# EAGLE board BMS-HVver2.0 (EAGLE 7.6.0), part 1 of 2
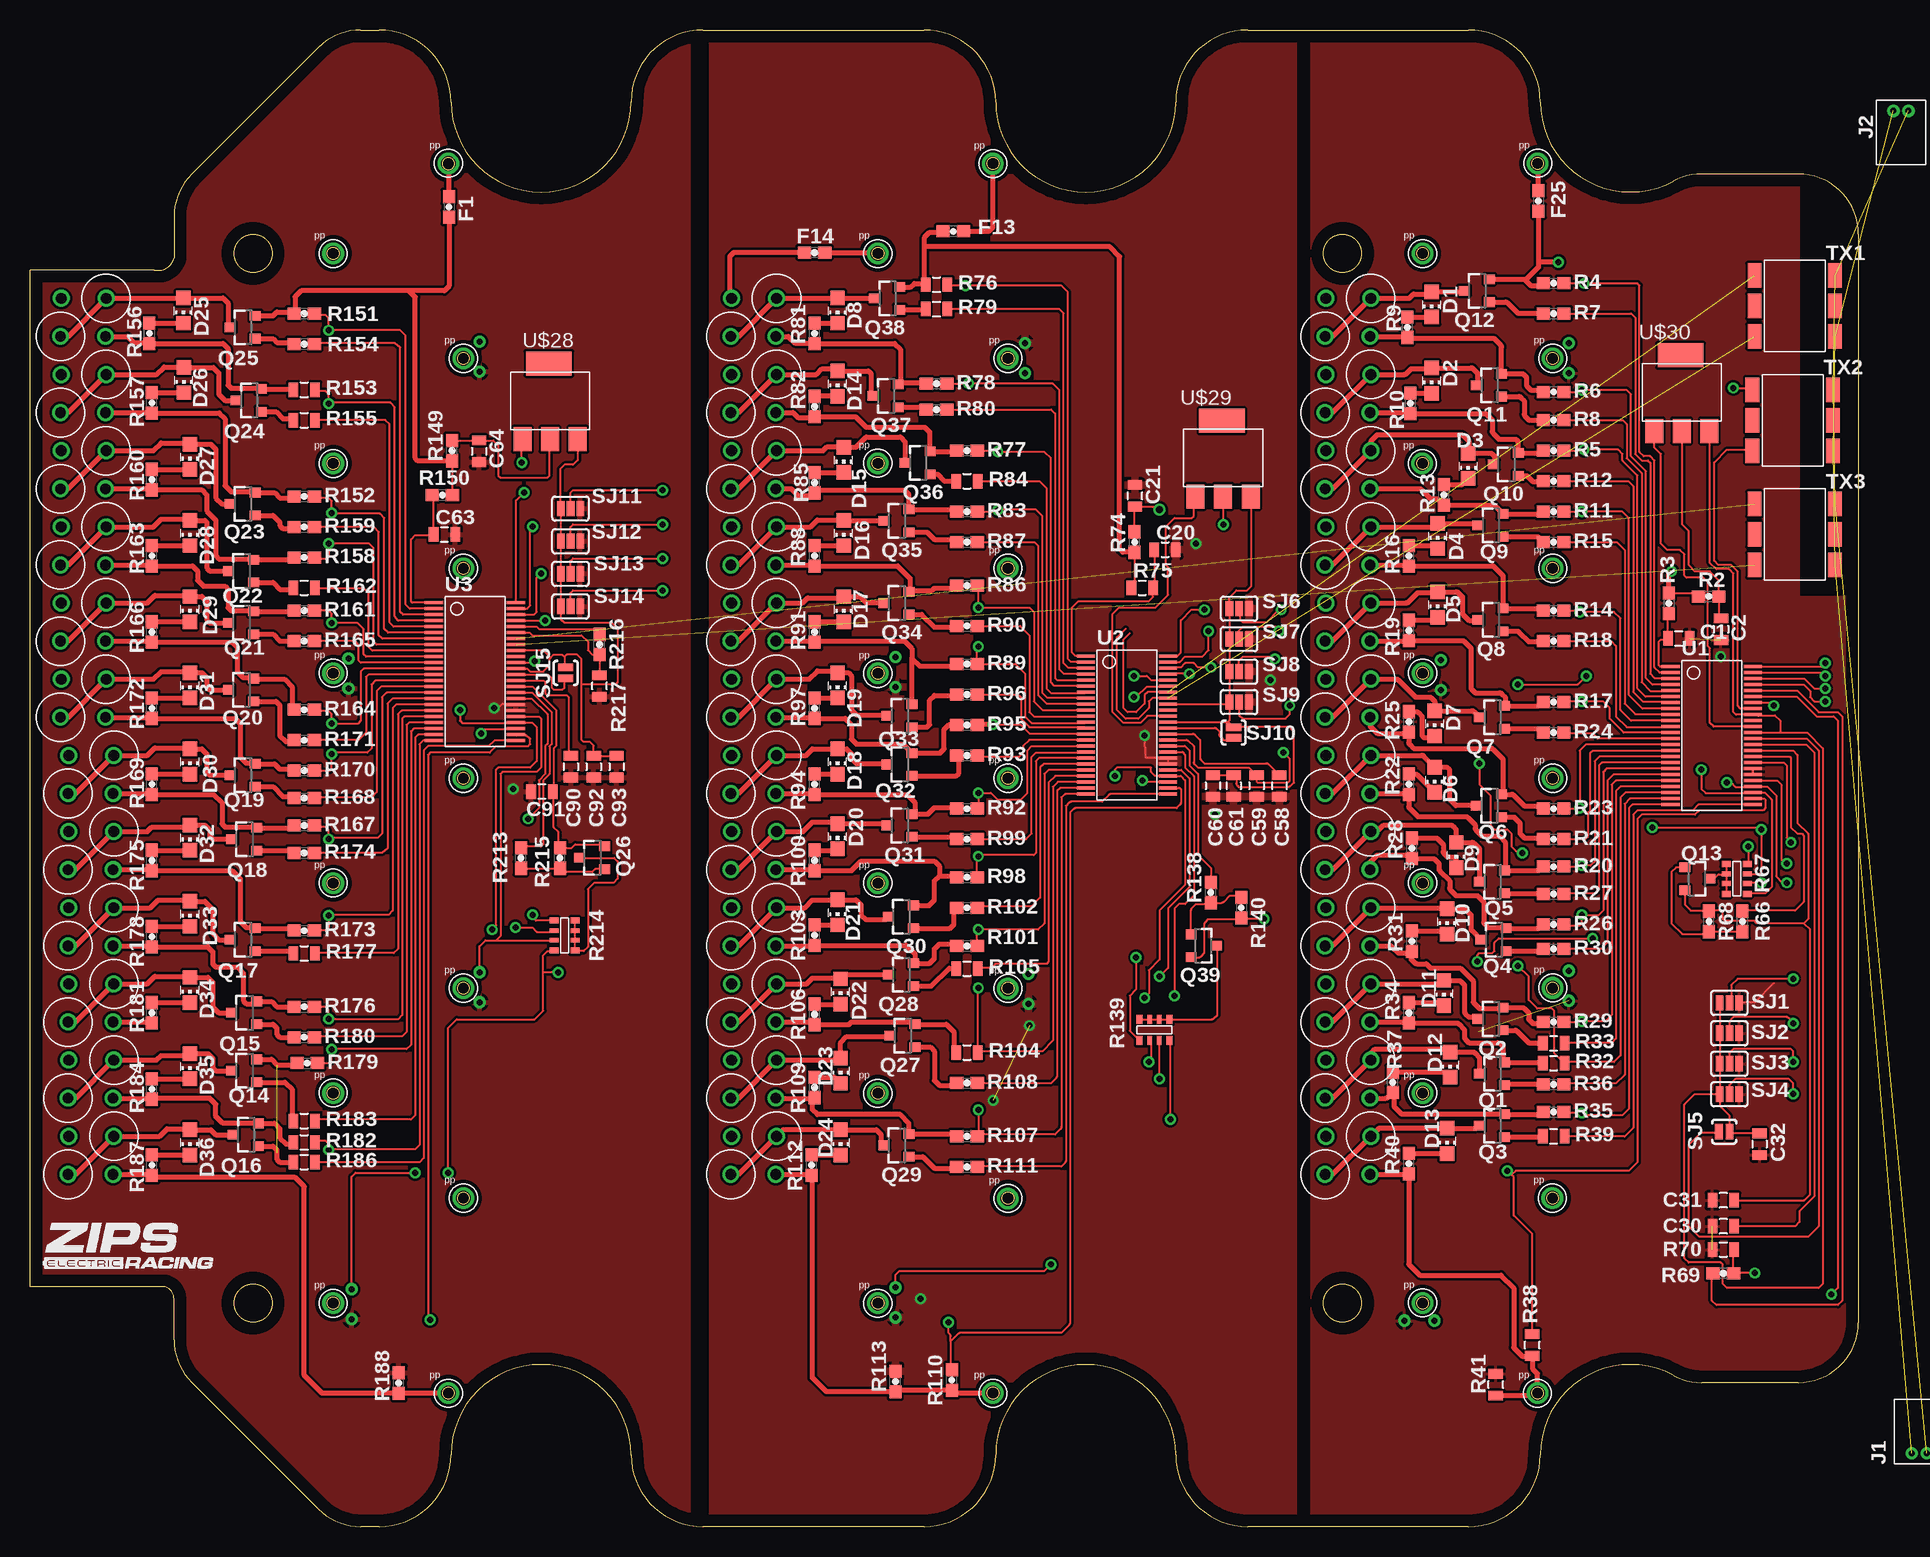
[diagram p0: board, top side]
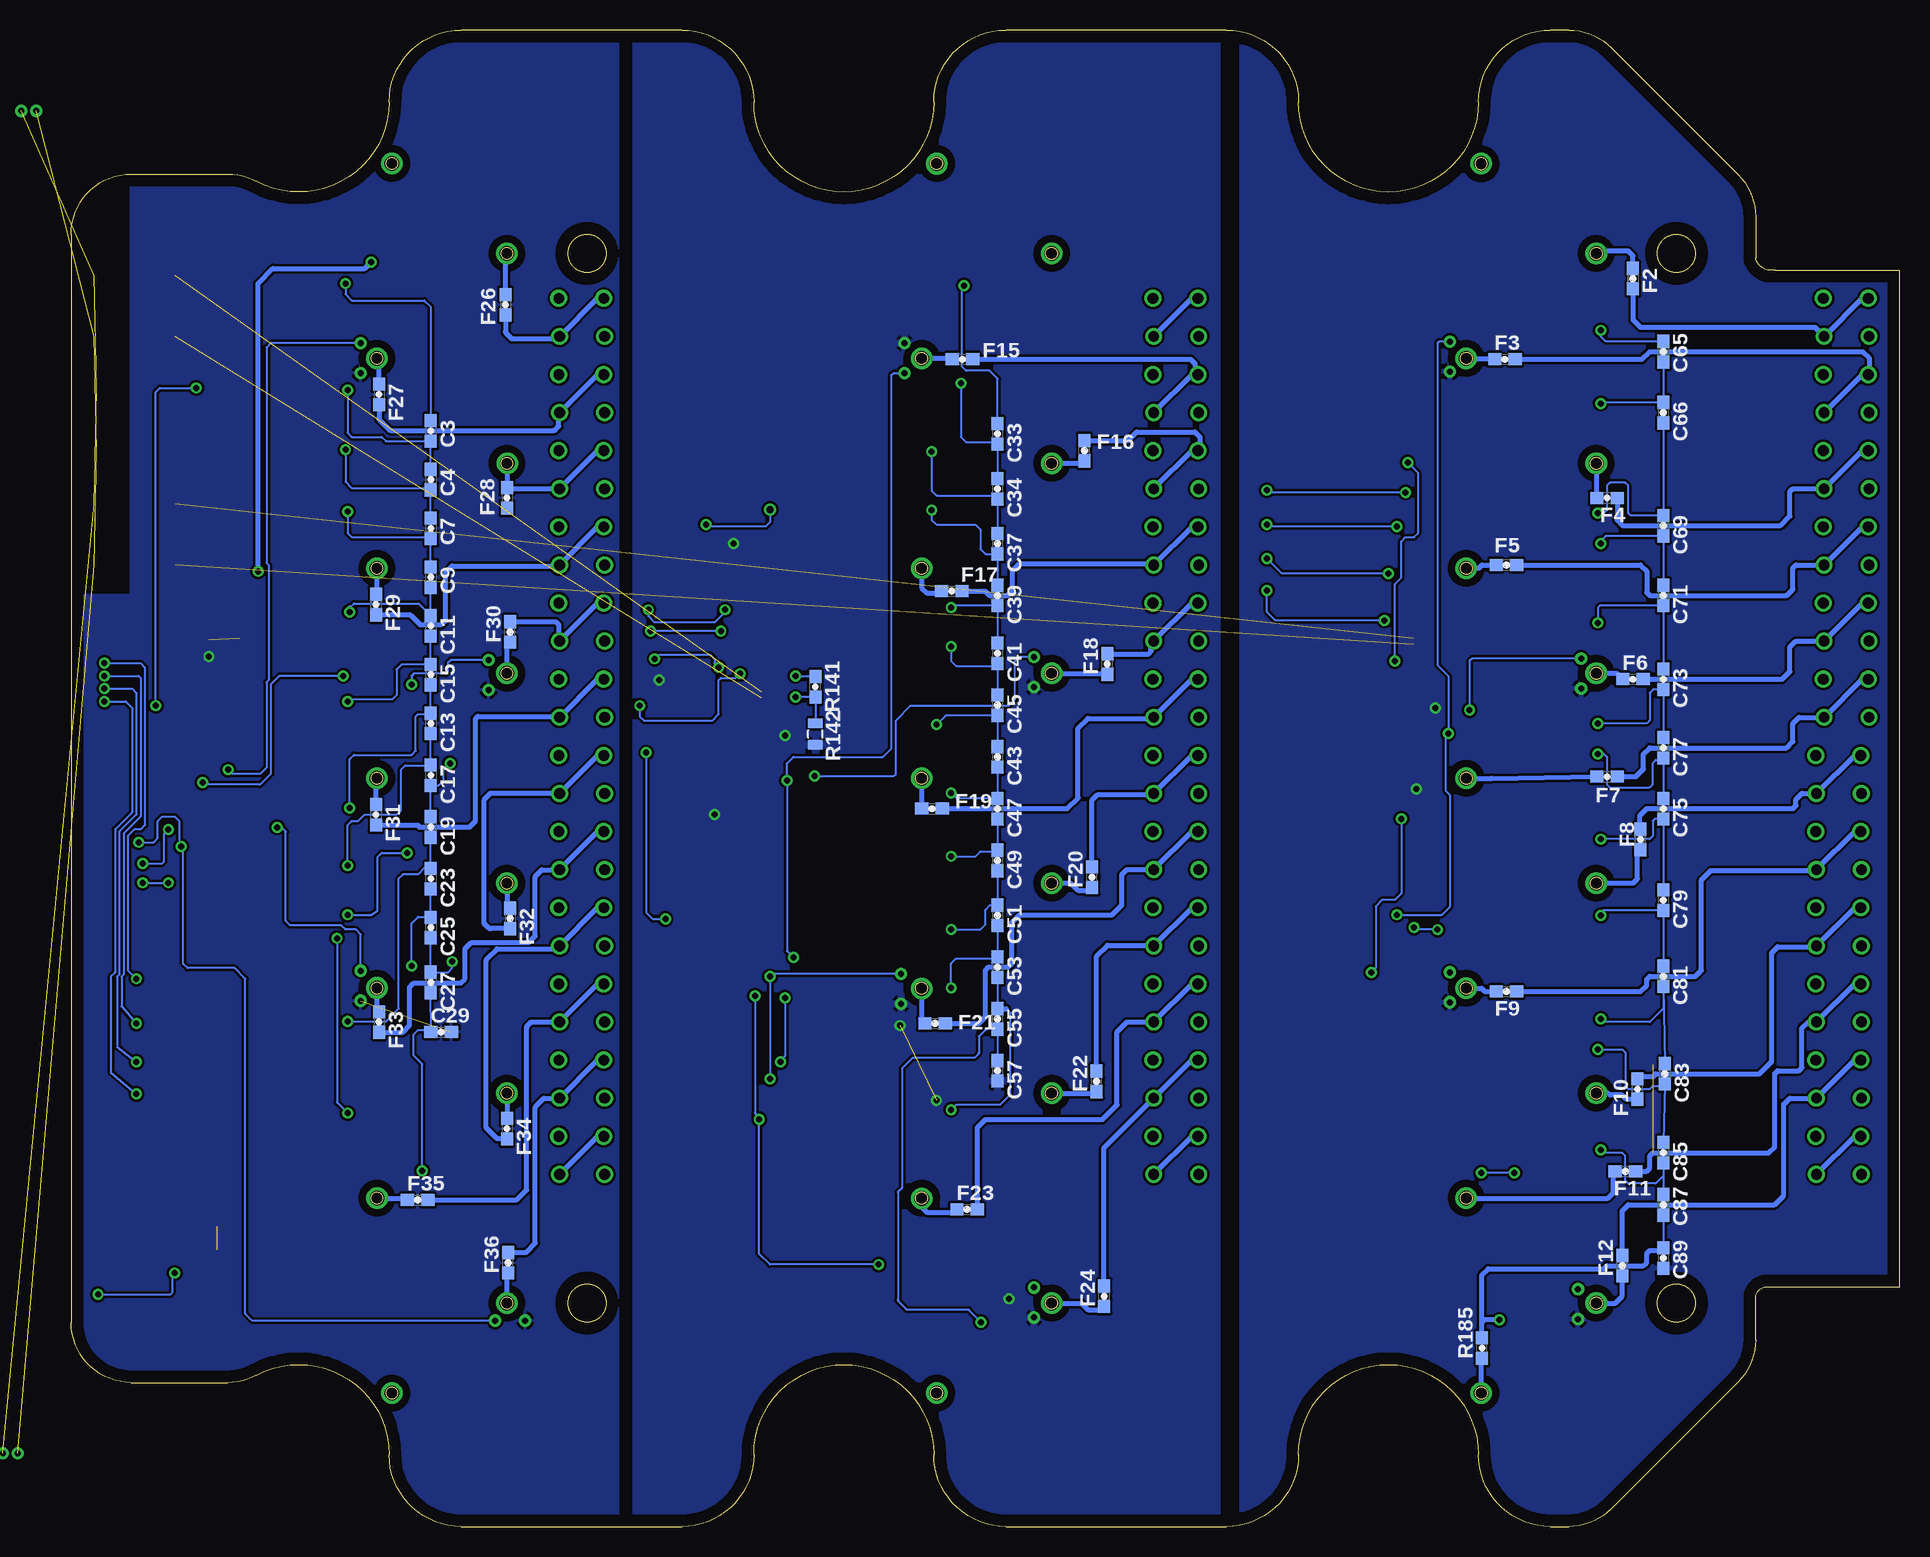
[diagram p1: board, bottom side, seen from below]

Size 152.4 x 124.75 mm. Coordinates in mm from the lower left corner, seen from the top.
Outline: 152.4,107.75 152.4,17 arc-90 147.4,12 139.34,12 arc-28 136.96,12.6 arc118 125.9,6 arc-90 119.9,0 101.5,0 arc-90 95.5,6 arc180 80.5,6 arc-90 74.5,0 56.1,0 arc-90 50.1,6 arc180 35.1,6 arc-90 29.1,0 27.57,0 arc-45 24.04,1.46 13.46,12.03 arc-45 12,15.57 12,19 arc90 11,20 0,20 0,104.75 10.37,104.75 arc90 12,105.75 12,109.18 arc-45 13.46,112.72 24.04,123.29 arc-45 27.57,124.75 29.1,124.75 arc-90 35.1,118.75 arc180 50.1,118.75 arc-90 56.1,124.75 74.5,124.75 arc-90 80.5,118.75 arc180 95.5,118.75 arc-90 101.5,124.75 119.9,124.75 arc-90 125.9,118.75 arc118 136.96,112.15 arc-28 139.34,112.75 147.4,112.75 arc-90 152.4,107.75
Outline: circle at 116.08,53.62 radius 0.5
Outline: circle at 126.92,62.38 radius 0.5
Outline: circle at 25.28,18.62 radius 0.5
Outline: circle at 25.28,36.12 radius 0.5
Outline: circle at 25.28,53.62 radius 0.5
Outline: circle at 70.68,18.62 radius 0.5
Outline: circle at 70.68,36.12 radius 0.5
Outline: circle at 70.68,53.62 radius 0.5
Outline: circle at 116.08,18.62 radius 0.5
Outline: circle at 36.12,27.38 radius 0.5
Outline: circle at 36.12,44.88 radius 0.5
Outline: circle at 36.12,62.38 radius 0.5
Outline: circle at 81.52,27.38 radius 0.5
Outline: circle at 81.52,44.88 radius 0.5
Outline: circle at 81.52,62.38 radius 0.5
Outline: circle at 126.92,27.38 radius 0.5
Outline: circle at 116.08,53.62 radius 0.5
Outline: circle at 126.92,62.38 radius 0.5
Outline: circle at 126.92,44.88 radius 0.5
Outline: circle at 116.08,36.12 radius 0.5
Copper layers (1*16): Top 0.035mm / dielectric 1.5mm / Bottom 0.035mm
Design rules "default": minimum track width 10mil, minimum drill 24mil, track to track 8mil, track to pad 8mil, pad to pad 8mil, via to via 8mil, smd to smd 8mil, copper to edge 40mil, drill to drill 8mil, minimum pad ring 10mil, minimum via ring 8mil, stop-mask expansion 4mil, vias tented up to drill 0mil, thermal gap 10mil

## Footprints (pad centres in the part's own frame; a part is rotated, then mirrored left to right if it is on the bottom)
0805 = smd 0.8 x 1.2: 1 -0.9,0; 2 0.9,0
0603 = smd 1.1 x 1: 1 -0.85,0; 2 0.85,0
CHIP_LED0805 = smd 1.2 x 1.2: A 0,-1.05; C 0,1.05
DF13-2P = drill 0.5: 1 -0.625,0; 2 0.625,0
SOT23 = smd 0.8 x 0.9: 1 -0.95,-1; 2 0.95,-1; 3 0,1.1
RR02J16RTB = drill 0.9: P$1 -3.75,0; P$2 0,0
MNR14 = smd 0.5 x 0.75: 1 -1.25,-0.9; 4 1.25,-0.9; 5 1.25,0.85; 8 -1.25,0.85 | smd 0.4 x 0.75: 2 -0.4,-0.9; 3 0.4,-0.9; 6 0.4,0.85; 7 -0.4,0.85
NTC-NXRT15XH103FA5B = drill 0.5: P$1 0,0; P$2 2.5,0
PAD-JUMPER-3-NO_YES_SILK = smd 0.635 x 1.27: 1 -0.813,0; 2 0,0; 3 0.813,0
PAD-JUMPER-2-NO_YES_SILK = smd 0.635 x 1.27: 1 -0.45,0; 2 0.45,0
PE-68386NLT = smd 1.143 x 2.032: 1 -3.378,2.54; 2 -3.378,0; 3 -3.378,-2.54; 4 3.353,-2.54; 5 3.353,0; 6 3.353,2.54
SSOP-48 = smd 0.25 x 1.524: 1 -5.75,-3.421; 2 -5.25,-3.421; 3 -4.75,-3.421; 4 -4.25,-3.421; 5 -3.75,-3.421; 6 -3.25,-3.421; 7 -2.75,-3.421; 8 -2.25,-3.421; 9 -1.75,-3.421; 10 -1.25,-3.421; 11 -0.75,-3.421; 12 -0.25,-3.421; 13 0.25,-3.421; 14 0.75,-3.421; 15 1.25,-3.421; 16 1.75,-3.421; 17 2.25,-3.421; 18 2.75,-3.421; 19 3.25,-3.421; 20 3.75,-3.421; 21 4.25,-3.421; 22 4.75,-3.421; 23 5.25,-3.421; 24 5.75,-3.421; 25 5.75,3.421; 26 5.25,3.421; 27 4.75,3.421; 28 4.25,3.421; 29 3.75,3.421; 30 3.25,3.421; 31 2.75,3.421; 32 2.25,3.421; 33 1.75,3.421; 34 1.25,3.421; 35 0.75,3.421; 36 0.25,3.421; 37 -0.25,3.421; 38 -0.75,3.421; 39 -1.25,3.421; 40 -1.75,3.421; 41 -2.25,3.421; 42 -2.75,3.421; 43 -3.25,3.421; 44 -3.75,3.421; 45 -4.25,3.421; 46 -4.75,3.421; 47 -5.25,3.421; 48 -5.75,3.421
POGOPIN = drill 1.2: 1 0,0
SOT223 = smd 1.5 x 2: P$1 0,0; P$2 2.3,0; P$3 4.6,0 | smd 3.8 x 2: P$4 2.2,6.3

## Placement (x,y rotation side)
C1  0.1UF  [0805]  137.44,74.03 0 top
C2  0.1UF  [0805]  140.94,74.8 270 top
C3  10NF  [0603]  122.43,91.33 270 bottom
C4  10NF  [0603]  122.43,87.27 270 bottom
C7  10NF  [0603]  122.43,83.2 270 bottom
C9  10NF  [0603]  122.43,79.14 270 bottom
C11  10NF  [0603]  122.43,75.08 270 bottom
C13  10NF  [0603]  122.43,66.95 270 bottom
C15  10NF  [0603]  122.43,71.01 270 bottom
C17  10NF  [0603]  122.43,62.63 270 bottom
C19  10NF  [0603]  122.43,58.31 270 bottom
C20  0.1UF  [0805]  94.62,81.42 0 top
C21  0.1UF  [0805]  92.1,85.92 90 top
C23  10NF  [0603]  122.43,53.99 270 bottom
C25  10NF  [0603]  122.43,49.93 270 bottom
C27  10NF  [0603]  122.43,45.36 270 bottom
C29  10NF  [0603]  121.56,41.22 0 bottom
C30  1UF  [0805]  141.15,25.04 180 top
C31  1UF  [0805]  141.15,27.2 180 top
C32  1UF  [0805]  144.17,31.87 270 top
C33  10NF  [0603]  75.18,91.08 270 bottom
C34  10NF  [0603]  75.18,86.5 270 bottom
C37  10NF  [0603]  75.18,81.93 270 bottom
C39  10NF  [0603]  75.18,77.61 270 bottom
C41  10NF  [0603]  75.18,72.79 270 bottom
C43  10NF  [0603]  75.18,64.15 270 bottom
C45  10NF  [0603]  75.18,68.47 270 bottom
C47  10NF  [0603]  75.18,59.84 270 bottom
C49  10NF  [0603]  75.18,55.52 270 bottom
C51  10NF  [0603]  75.18,50.95 270 bottom
C53  10NF  [0603]  75.18,46.63 270 bottom
C55  10NF  [0603]  75.18,42.31 270 bottom
C57  10NF  [0603]  75.18,37.99 270 bottom
C58  1UF  [0805]  104.14,61.74 270 top
C59  1UF  [0805]  102.23,61.74 270 top
C60  1UF  [0805]  98.6,61.74 270 top
C61  1UF  [0805]  100.33,61.74 270 top
C63  0.1UF  [0805]  34.54,82.69 0 top
C64  0.1UF  [0805]  37.44,89.63 270 top
C65  10NF  [0603]  19.69,97.94 270 bottom
C66  10NF  [0603]  19.69,92.86 270 bottom
C69  10NF  [0603]  19.69,83.43 270 bottom
C71  10NF  [0603]  19.69,77.61 270 bottom
C73  10NF  [0603]  19.69,70.63 270 bottom
C75  10NF  [0603]  19.69,59.84 270 bottom
C77  10NF  [0603]  19.69,64.92 270 bottom
C79  10NF  [0603]  19.69,52.22 270 bottom
C81  10NF  [0603]  19.69,45.86 270 bottom
C83  10NF  [0603]  19.56,37.74 270 bottom
C85  10NF  [0603]  19.69,31.16 270 bottom
C87  10NF  [0603]  19.69,26.81 270 bottom
C89  10NF  [0603]  19.69,22.37 270 bottom
C90  1UF  [0805]  45.09,63.34 270 top
C91  1UF  [0805]  42.67,61.26 180 top
C92  1UF  [0805]  46.99,63.34 270 top
C93  1UF  [0805]  48.9,63.34 270 top
D1  LED_RED  [CHIP_LED0805]  116.84,101.87 180 top
D2  LED_RED  [CHIP_LED0805]  116.84,95.52 180 top
D3  LED_RED  [CHIP_LED0805]  119.89,88.41 180 top
D4  LED_RED  [CHIP_LED0805]  117.35,82.57 180 top
D5  LED_RED  [CHIP_LED0805]  117.35,76.85 180 top
D6  LED_RED  [CHIP_LED0805]  117.09,62.25 180 top
D7  LED_RED  [CHIP_LED0805]  117.09,66.95 180 top
D8  LED_RED  [CHIP_LED0805]  67.31,101.36 180 top
D9  LED_RED  [CHIP_LED0805]  118.9,55.97 180 top
D10  LED_RED  [CHIP_LED0805]  118.11,50.44 180 top
D11  LED_RED  [CHIP_LED0805]  117.86,44.47 180 top
D12  LED_RED  [CHIP_LED0805]  118.36,38.5 180 top
D13  LED_RED  [CHIP_LED0805]  118.11,32.15 180 top
D14  LED_RED  [CHIP_LED0805]  67.31,95.27 180 top
D15  LED_RED  [CHIP_LED0805]  67.82,88.92 180 top
D16  LED_RED  [CHIP_LED0805]  67.82,82.82 180 top
D17  LED_RED  [CHIP_LED0805]  67.82,76.47 180 top
D18  LED_RED  [CHIP_LED0805]  67.31,63.77 180 top
D19  LED_RED  [CHIP_LED0805]  67.31,70.12 180 top
D20  LED_RED  [CHIP_LED0805]  67.31,57.55 180 top
D21  LED_RED  [CHIP_LED0805]  67.31,51.2 180 top
D22  LED_RED  [CHIP_LED0805]  67.56,44.59 180 top
D23  LED_RED  [CHIP_LED0805]  67.56,37.99 180 top
D24  LED_RED  [CHIP_LED0805]  67.56,32.02 180 top
D25  LED_RED  [CHIP_LED0805]  12.78,101.36 180 top
D26  LED_RED  [CHIP_LED0805]  12.83,95.57 180 top
D27  LED_RED  [CHIP_LED0805]  13.34,89.17 180 top
D28  LED_RED  [CHIP_LED0805]  13.34,82.82 180 top
D29  LED_RED  [CHIP_LED0805]  13.34,76.47 180 top
D30  LED_RED  [CHIP_LED0805]  13.34,63.77 180 top
D31  LED_RED  [CHIP_LED0805]  13.34,70.12 180 top
D32  LED_RED  [CHIP_LED0805]  13.34,57.42 180 top
D33  LED_RED  [CHIP_LED0805]  13.34,51.07 180 top
D34  LED_RED  [CHIP_LED0805]  13.34,44.72 180 top
D35  LED_RED  [CHIP_LED0805]  13.34,38.37 180 top
D36  LED_RED  [CHIP_LED0805]  13.34,32.02 180 top
F1  FUSE_750MA_63V_0603  [0603]  34.93,110 270 top
F2  FUSE_750MA_63V_0603  [0603]  22.23,104.03 270 bottom
F3  FUSE_750MA_63V_0603  [0603]  32.89,97.3 0 bottom
F4  FUSE_750MA_63V_0603  [0603]  24.38,85.74 0 bottom
F5  FUSE_750MA_63V_0603  [0603]  32.77,80.16 0 bottom
F6  FUSE_750MA_63V_0603  [0603]  22.23,70.63 0 bottom
F7  FUSE_750MA_63V_0603  [0603]  24.38,62.5 0 bottom
F8  FUSE_750MA_63V_0603  [0603]  21.59,57.27 90 bottom
F9  FUSE_750MA_63V_0603  [0603]  32.77,44.59 0 bottom
F10  FUSE_750MA_63V_0603  [0603]  21.84,36.47 90 bottom
F11  FUSE_750MA_63V_0603  [0603]  22.86,29.61 0 bottom
F12  FUSE_750MA_63V_0603  [0603]  23.11,21.73 90 bottom
F13  FUSE_750MA_63V_0603  [0603]  76.96,107.97 180 top
F14  FUSE_750MA_63V_0603  [0603]  65.41,106.19 180 top
F15  FUSE_750MA_63V_0603  [0603]  78.11,97.3 0 bottom
F16  FUSE_750MA_63V_0603  [0603]  67.95,89.68 90 bottom
F17  FUSE_750MA_63V_0603  [0603]  78.99,77.97 0 bottom
F18  FUSE_750MA_63V_0603  [0603]  66.04,71.9 90 bottom
F19  FUSE_750MA_63V_0603  [0603]  80.65,59.84 0 bottom
F20  FUSE_750MA_63V_0603  [0603]  67.31,54.12 90 bottom
F21  FUSE_750MA_63V_0603  [0603]  80.39,41.93 0 bottom
F22  FUSE_750MA_63V_0603  [0603]  66.93,37.1 90 bottom
F23  FUSE_750MA_63V_0603  [0603]  77.72,26.43 0 bottom
F24  FUSE_750MA_63V_0603  [0603]  66.29,19.2 90 bottom
F25  FUSE_750MA_63V_0603  [0603]  125.73,110.51 270 top
F26  FUSE_750MA_63V_0603  [0603]  116.21,101.85 270 bottom
F27  FUSE_750MA_63V_0603  [0603]  126.75,94.38 270 bottom
F28  FUSE_750MA_63V_0603  [0603]  116.08,85.74 270 bottom
F29  FUSE_750MA_63V_0603  [0603]  127,76.85 270 bottom
F30  FUSE_750MA_63V_0603  [0603]  115.82,74.57 90 bottom
F31  FUSE_750MA_63V_0603  [0603]  127,59.33 270 bottom
F32  FUSE_750MA_63V_0603  [0603]  115.82,50.69 270 bottom
F33  FUSE_750MA_63V_0603  [0603]  126.75,42.05 270 bottom
F34  FUSE_750MA_63V_0603  [0603]  116.08,33.16 270 bottom
F35  FUSE_750MA_63V_0603  [0603]  123.52,27.22 0 bottom
F36  FUSE_750MA_63V_0603  [0603]  115.98,21.99 90 bottom
J1  M2_DF13-2P  [DF13-2P]  157.48,6.11 0 top  (outside the outline)
J2  M2_DF13-2P  [DF13-2P]  155.96,118 180 top
Q1  BSS308PE  [SOT23]  121.92,37.74 90 top
Q2  BSS308PE  [SOT23]  121.79,42.31 90 top
Q3  BSS308PE  [SOT23]  121.92,33.42 90 top
Q4  BSS308PE  [SOT23]  122.05,48.91 90 top
Q5  BSS308PE  [SOT23]  121.92,53.74 90 top
Q6  BSS308PE  [SOT23]  121.67,60.09 90 top
Q7  BSS308PE  [SOT23]  121.92,67.45 90 top
Q8  BSS308PE  [SOT23]  121.79,75.58 90 top
Q9  BSS308PE  [SOT23]  121.79,83.46 90 top
Q10  BSS308PE  [SOT23]  123.06,88.54 90 top
Q11  BSS308PE  [SOT23]  121.67,95.14 90 top
Q12  BSS308PE  [SOT23]  120.65,103.02 90 top
Q13  BSS308PE  [SOT23]  138.94,53.99 270 top
Q14  BSS308PE  [SOT23]  17.91,37.99 90 top
Q15  BSS308PE  [SOT23]  17.91,42.82 90 top
Q16  BSS308PE  [SOT23]  18.03,32.66 90 top
Q17  BSS308PE  [SOT23]  17.78,48.91 90 top
Q18  BSS308PE  [SOT23]  17.91,57.3 90 top
Q19  BSS308PE  [SOT23]  17.78,62.63 90 top
Q20  BSS308PE  [SOT23]  17.65,69.74 90 top
Q21  BSS308PE  [SOT23]  17.65,75.33 90 top
Q22  BSS308PE  [SOT23]  17.65,79.65 90 top
Q23  BSS308PE  [SOT23]  17.78,85.23 90 top
Q24  BSS308PE  [SOT23]  18.29,93.87 90 top
Q25  BSS308PE  [SOT23]  17.78,99.97 90 top
Q26  BSS308PE  [SOT23]  46.89,55.75 90 top
Q27  BSS308PE  [SOT23]  72.77,40.91 90 top
Q28  BSS308PE  [SOT23]  72.64,45.99 90 top
Q29  BSS308PE  [SOT23]  72.26,31.77 90 top
Q30  BSS308PE  [SOT23]  72.64,50.82 90 top
Q31  BSS308PE  [SOT23]  72.52,58.44 90 top
Q32  BSS308PE  [SOT23]  72.52,63.52 90 top
Q33  BSS308PE  [SOT23]  72.52,67.58 90 top
Q34  BSS308PE  [SOT23]  72.26,76.98 90 top
Q35  BSS308PE  [SOT23]  72.26,83.84 90 top
Q36  BSS308PE  [SOT23]  74.04,88.66 90 top
Q37  BSS308PE  [SOT23]  71.37,94.25 90 top
Q38  BSS308PE  [SOT23]  71.5,102.38 90 top
Q39  BSS308PE  [SOT23]  97.79,48.41 270 top
R2  100  [0603]  139.93,77.54 0 top
R3  100  [0603]  136.6,76.95 270 top
R4  100  [0603]  127,103.65 0 top
R5  100  [0603]  127,89.68 0 top
R6  100  [0603]  127,94.58 0 top
R7  3.3K  [0603]  127,101.11 0 top
R8  3.3K  [0603]  127,92.22 0 top
R9  475  [0603]  114.81,99.97 90 top
R10  475  [0603]  115.06,93.62 90 top
R11  100  [0603]  127,84.6 0 top
R12  3.3K  [0603]  127,87.14 0 top
R13  475  [0603]  117.86,86 90 top
R14  100  [0603]  127,76.34 0 top
R15  3.3K  [0603]  127,82.06 0 top
R16  475  [0603]  114.94,80.92 90 top
R17  100  [0603]  127,68.72 0 top
R18  3.3K  [0603]  127,73.81 0 top
R19  475  [0603]  114.94,74.69 90 top
R20  100  [0603]  127,55.01 0 top
R21  3.3K  [0603]  127,57.3 0 top
R22  475  [0603]  114.94,61.87 90 top
R23  100  [0603]  127,59.84 0 top
R24  3.3K  [0603]  127,66.19 0 top
R25  475  [0603]  114.94,67.07 90 top
R26  100  [0603]  127,50.18 0 top
R27  3.3K  [0603]  127,52.72 0 top
R28  475  [0603]  115.19,56.53 90 top
R29  100  [0603]  127,42.05 0 top
R30  3.3K  [0603]  127,48.15 0 top
R31  475  [0603]  115.19,48.79 90 top
R32  100  [0805]  127,38.63 0 top
R33  3.3K  [0805]  127,40.28 0 top
R34  475  [0603]  114.94,42.82 90 top
R35  100  [0603]  127,34.56 0 top
R36  3.3K  [0603]  127,36.85 0 top
R37  475  [0603]  113.59,37.03 90 top
R38  100  [0805]  125.22,15.13 90 top
R39  3.3K  [0805]  127,32.53 0 top
R40  475  [0603]  114.94,30.24 90 top
R41  0  [0805]  122.17,11.83 90 top
R42  16  [RR02J16RTB]  107.95,29.35 180 top
R43  16  [RR02J16RTB]  111.76,32.53 0 top
R44  16  [RR02J16RTB]  107.95,35.7 180 top
R45  16  [RR02J16RTB]  111.76,38.88 0 top
R46  16  [RR02J16RTB]  107.95,42.05 180 top
R47  16  [RR02J16RTB]  111.76,45.23 0 top
R48  16  [RR02J16RTB]  107.95,48.41 180 top
R49  16  [RR02J16RTB]  111.76,51.58 0 top
R50  16  [RR02J16RTB]  107.95,54.76 180 top
R51  16  [RR02J16RTB]  111.76,57.93 0 top
R52  16  [RR02J16RTB]  107.95,61.1 180 top
R53  16  [RR02J16RTB]  111.76,64.28 0 top
R54  16  [RR02J16RTB]  107.95,67.45 180 top
R55  16  [RR02J16RTB]  111.76,70.63 0 top
R56  16  [RR02J16RTB]  107.95,73.81 180 top
R57  16  [RR02J16RTB]  111.76,76.98 0 top
R58  16  [RR02J16RTB]  107.95,80.16 180 top
R59  16  [RR02J16RTB]  111.76,83.33 0 top
R60  16  [RR02J16RTB]  107.95,86.5 180 top
R61  16  [RR02J16RTB]  111.76,89.68 0 top
R62  16  [RR02J16RTB]  107.95,92.86 180 top
R63  16  [RR02J16RTB]  111.76,96.03 0 top
R64  16  [RR02J16RTB]  107.95,99.2 180 top
R65  16  [RR02J16RTB]  111.76,102.38 0 top
R66  1K  [0603]  142.75,50.44 90 top
R67  10K  [MNR14]  142.24,53.99 90 top
R68  100K  [0603]  139.95,50.44 90 top
R69  1.2K  [0603]  141.15,21.1 180 top
R70  787  [0805]  141.15,23.08 0 top
R71  10K-NTC  [NTC-NXRT15XH103FA5B]  128.27,96.16 90 top
R72  10K-NTC  [NTC-NXRT15XH103FA5B]  117.6,69.74 90 top
R73  10K-NTC  [NTC-NXRT15XH103FA5B]  128.27,43.83 90 top
R74  100  [0603]  92.08,82.06 90 top
R75  100  [0805]  92.71,78.25 0 top
R76  100  [0805]  75.56,103.52 0 top
R77  100  [0603]  78.11,89.68 0 top
R78  100  [0603]  75.56,95.27 0 top
R79  3.3K  [0805]  75.56,101.49 0 top
R80  3.3K  [0603]  75.56,93.11 0 top
R81  475  [0603]  65.41,99.46 90 top
R82  475  [0603]  65.41,93.36 90 top
R83  100  [0603]  78.11,84.6 0 top
R84  3.3K  [0805]  78.11,87.14 0 top
R85  475  [0603]  65.41,87.01 90 top
R86  100  [0603]  78.11,78.43 0 top
R87  3.3K  [0603]  78.11,82.06 0 top
R88  475  [0603]  65.41,80.92 90 top
R89  100  [0603]  78.11,71.9 0 top
R90  3.3K  [0603]  78.11,75.08 0 top
R91  475  [0603]  65.41,74.57 90 top
R92  100  [0603]  78.11,59.84 0 top
R93  3.3K  [0603]  78.11,64.28 0 top
R94  475  [0603]  65.41,61.87 90 top
R95  100  [0603]  78.11,66.82 0 top
R96  3.3K  [0603]  78.11,69.36 0 top
R97  475  [0603]  65.41,68.22 90 top
R98  100  [0603]  78.11,54.12 0 top
R99  3.3K  [0603]  78.11,57.3 0 top
R100  475  [0603]  65.41,55.52 90 top
R101  100  [0603]  78.11,48.41 0 top
R102  3.3K  [0603]  78.11,51.58 0 top
R103  475  [0603]  65.41,49.29 90 top
R104  100  [0805]  78.11,39.52 0 top
R105  3.3K  [0805]  78.11,46.5 0 top
R106  475  [0603]  65.41,42.69 90 top
R107  100  [0603]  78.11,32.53 0 top
R108  3.3K  [0603]  78.11,36.98 0 top
R109  475  [0603]  65.41,36.59 90 top
R110  100  [0603]  76.84,12.21 90 top
R111  3.3K  [0603]  78.11,29.99 0 top
R112  475  [0603]  65.15,30.12 90 top
R113  0  [0603]  72.14,12.08 90 top
R114  16  [RR02J16RTB]  58.42,29.35 180 top
R115  16  [RR02J16RTB]  62.23,32.53 0 top
R116  16  [RR02J16RTB]  58.42,35.7 180 top
R117  16  [RR02J16RTB]  62.23,38.88 0 top
R118  16  [RR02J16RTB]  58.42,42.05 180 top
R119  16  [RR02J16RTB]  62.23,45.23 0 top
R120  16  [RR02J16RTB]  58.42,48.41 180 top
R121  16  [RR02J16RTB]  62.23,51.58 0 top
R122  16  [RR02J16RTB]  58.42,54.76 180 top
R123  16  [RR02J16RTB]  62.23,57.93 0 top
R124  16  [RR02J16RTB]  58.42,61.1 180 top
R125  16  [RR02J16RTB]  62.23,64.28 0 top
R126  16  [RR02J16RTB]  58.42,67.45 180 top
R127  16  [RR02J16RTB]  62.23,70.63 0 top
R128  16  [RR02J16RTB]  58.42,73.81 180 top
R129  16  [RR02J16RTB]  62.23,76.98 0 top
R130  16  [RR02J16RTB]  58.42,80.16 180 top
R131  16  [RR02J16RTB]  62.23,83.33 0 top
R132  16  [RR02J16RTB]  58.42,86.5 180 top
R133  16  [RR02J16RTB]  62.23,89.68 0 top
R134  16  [RR02J16RTB]  58.42,92.86 180 top
R135  16  [RR02J16RTB]  62.23,96.03 0 top
R136  16  [RR02J16RTB]  58.42,99.2 180 top
R137  16  [RR02J16RTB]  62.23,102.38 0 top
R138  1K  [0603]  98.43,52.85 90 top
R139  10K  [MNR14]  93.73,41.42 0 top
R140  100K  [0603]  100.97,51.58 270 top
R141  1.2K  [0603]  90.37,70 90 bottom
R142  787  [0805]  90.37,66.06 90 bottom
R143  10K-NTC  [NTC-NXRT15XH103FA5B]  82.93,98.65 270 top
R144  10K-NTC  [NTC-NXRT15XH103FA5B]  72.14,70 90 top
R145  10K-NTC  [NTC-NXRT15XH103FA5B]  83.24,43.58 90 top
R146  10K-NTC  [NTC-NXRT15XH103FA5B]  72.14,17.42 90 top
R147  10K-NTC  [NTC-NXRT15XH103FA5B]  114.55,17.16 0 top
R149  100  [0603]  35.18,89.68 90 top
R150  100  [0603]  34.37,85.97 180 top
R151  100  [0603]  22.86,101.11 0 top
R152  100  [0603]  22.86,85.87 0 top
R153  100  [0805]  22.86,94.76 0 top
R154  3.3K  [0603]  22.86,98.57 0 top
R155  3.3K  [0805]  22.86,92.22 0 top
R156  475  [0603]  9.96,99.46 90 top
R157  475  [0603]  10.16,93.67 90 top
R158  100  [0603]  22.86,80.79 0 top
R159  3.3K  [0603]  22.86,83.33 0 top
R160  475  [0603]  10.16,87.27 90 top
R161  100  [0603]  22.86,76.34 0 top
R162  3.3K  [0805]  22.86,78.25 0 top
R163  475  [0603]  10.16,80.92 90 top
R164  100  [0603]  22.86,68.09 0 top
R165  3.3K  [0603]  22.86,73.81 0 top
R166  475  [0603]  10.16,74.57 90 top
R167  100  [0603]  22.86,58.44 0 top
R168  3.3K  [0603]  22.86,60.72 0 top
R169  475  [0603]  10.16,61.87 90 top
R170  100  [0603]  22.86,63.01 0 top
R171  3.3K  [0603]  22.86,65.55 0 top
R172  475  [0603]  10.16,68.22 90 top
R173  100  [0603]  22.86,49.67 0 top
R174  3.3K  [0603]  22.86,56.15 0 top
R175  475  [0603]  10.16,55.52 90 top
R176  100  [0603]  22.86,43.33 0 top
R177  3.3K  [0805]  22.86,47.77 0 top
R178  475  [0603]  10.16,49.17 90 top
R179  100  [0603]  23.11,38.63 0 top
R180  3.3K  [0603]  22.86,40.78 0 top
R181  475  [0603]  10.16,42.82 90 top
R182  100  [0805]  22.86,32.02 0 top
R183  3.3K  [0805]  22.86,33.8 0 top
R184  475  [0603]  10.16,36.47 90 top
R185  100  [0603]  34.8,14.88 90 bottom
R186  3.3K  [0805]  22.86,30.37 0 top
R187  475  [0603]  10.16,30.12 90 top
R188  0  [0603]  30.73,11.96 90 top
R189  16  [RR02J16RTB]  3.17,29.35 180 top
R190  16  [RR02J16RTB]  6.98,32.53 0 top
R191  16  [RR02J16RTB]  3.17,35.7 180 top
R192  16  [RR02J16RTB]  6.98,38.88 0 top
R193  16  [RR02J16RTB]  3.17,42.05 180 top
R194  16  [RR02J16RTB]  6.98,45.23 0 top
R195  16  [RR02J16RTB]  3.17,48.41 180 top
R196  16  [RR02J16RTB]  6.98,51.58 0 top
R197  16  [RR02J16RTB]  3.17,54.76 180 top
R198  16  [RR02J16RTB]  6.98,57.93 0 top
R199  16  [RR02J16RTB]  3.17,61.1 180 top
R200  16  [RR02J16RTB]  6.98,64.28 0 top
R201  16  [RR02J16RTB]  2.54,67.45 180 top
R202  16  [RR02J16RTB]  6.35,70.63 0 top
R203  16  [RR02J16RTB]  2.54,73.81 180 top
R204  16  [RR02J16RTB]  6.35,76.98 0 top
R205  16  [RR02J16RTB]  2.54,80.16 180 top
R206  16  [RR02J16RTB]  6.35,83.33 0 top
R207  16  [RR02J16RTB]  2.54,86.5 180 top
R208  16  [RR02J16RTB]  6.35,89.68 0 top
R209  16  [RR02J16RTB]  2.54,92.86 180 top
R210  16  [RR02J16RTB]  6.35,96.03 0 top
R211  16  [RR02J16RTB]  6.35,102.38 0 top
R212  16  [RR02J16RTB]  2.54,99.2 180 top
R213  1K  [0603]  40.92,55.72 90 top
R214  10K  [MNR14]  44.58,49.27 270 top
R215  100K  [0603]  44.17,55.72 90 top
R216  1.2K  [0603]  47.47,73.53 90 top
R217  787  [0805]  47.47,70.07 90 top
R218  10K-NTC  [NTC-NXRT15XH103FA5B]  37.47,96.28 90 top
R219  10K-NTC  [NTC-NXRT15XH103FA5B]  26.54,69.87 90 top
R220  10K-NTC  [NTC-NXRT15XH103FA5B]  37.47,43.71 90 top
R221  10K-NTC  [NTC-NXRT15XH103FA5B]  26.8,17.29 90 top
SJ1  [PAD-JUMPER-3-NO_YES_SILK]  141.66,43.66 0 top
SJ2  [PAD-JUMPER-3-NO_YES_SILK]  141.66,41.12 0 top
SJ3  [PAD-JUMPER-3-NO_YES_SILK]  141.66,38.58 0 top
SJ4  [PAD-JUMPER-3-NO_YES_SILK]  141.66,36.04 0 top
SJ5  [PAD-JUMPER-2-NO_YES_SILK]  141.22,32.91 0 top
SJ6  [PAD-JUMPER-3-NO_YES_SILK]  100.79,76.52 0 top
SJ7  [PAD-JUMPER-3-NO_YES_SILK]  100.79,73.98 0 top
SJ8  [PAD-JUMPER-3-NO_YES_SILK]  100.79,71.27 0 top
SJ9  [PAD-JUMPER-3-NO_YES_SILK]  100.79,68.72 0 top
SJ10  [PAD-JUMPER-2-NO_YES_SILK]  100.33,66.19 90 top
SJ11  [PAD-JUMPER-3-NO_YES_SILK]  45.06,84.85 0 top
SJ12  [PAD-JUMPER-3-NO_YES_SILK]  45.06,82.14 0 top
SJ13  [PAD-JUMPER-3-NO_YES_SILK]  45.06,79.42 0 top
SJ14  [PAD-JUMPER-3-NO_YES_SILK]  45.06,76.7 0 top
SJ15  [PAD-JUMPER-2-NO_YES_SILK]  44.65,71.16 90 top
TX1  PE-68386NLT  [PE-68386NLT]  147.12,101.75 0 top
TX2  PE-68386NLT  [PE-68386NLT]  146.94,92.22 0 top
TX3  PE-68386NLT  [PE-68386NLT]  147.12,82.69 0 top
U1  LTC6804-2  [SSOP-48]  140.18,65.93 270 top
U2  LTC6804-2  [SSOP-48]  91.44,66.82 270 top
U3  LTC6804-2  [SSOP-48]  37.08,71.27 270 top
U$1  POGOPIN  [POGOPIN]  125.65,11.12 0 top
U$2  POGOPIN  [POGOPIN]  116.08,18.64 0 top
U$3  POGOPIN  [POGOPIN]  126.9,27.37 0 top
U$4  POGOPIN  [POGOPIN]  116.08,36.14 0 top
U$5  POGOPIN  [POGOPIN]  126.92,44.9 0 top
U$6  POGOPIN  [POGOPIN]  116.08,53.64 0 top
U$7  POGOPIN  [POGOPIN]  126.92,62.38 0 top
U$8  POGOPIN  [POGOPIN]  116.08,71.14 0 top
U$9  POGOPIN  [POGOPIN]  126.92,79.88 0 top
U$10  POGOPIN  [POGOPIN]  116.05,88.61 0 top
U$11  POGOPIN  [POGOPIN]  126.92,97.38 0 top
U$12  POGOPIN  [POGOPIN]  116.08,106.11 0 top
U$13  POGOPIN  [POGOPIN]  125.68,113.63 0 top
U$14  POGOPIN  [POGOPIN]  34.87,11.12 0 top
U$15  POGOPIN  [POGOPIN]  25.27,18.61 0 top
U$16  POGOPIN  [POGOPIN]  36.12,27.37 0 top
U$17  POGOPIN  [POGOPIN]  25.27,36.14 0 top
U$18  POGOPIN  [POGOPIN]  36.12,44.87 0 top
U$19  POGOPIN  [POGOPIN]  25.27,53.64 0 top
U$20  POGOPIN  [POGOPIN]  36.12,62.38 0 top
U$21  POGOPIN  [POGOPIN]  25.27,71.14 0 top
U$22  POGOPIN  [POGOPIN]  36.12,79.88 0 top
U$23  POGOPIN  [POGOPIN]  25.27,88.61 0 top
U$24  POGOPIN  [POGOPIN]  36.12,97.38 0 top
U$25  POGOPIN  [POGOPIN]  25.27,106.11 0 top
U$26  POGOPIN  [POGOPIN]  34.87,113.63 0 top
U$27  LOGO16-2-L  [2016-2-LOGO-L]  1.02,21.35 0 top
U$28  NSV1C201MZ4T1G  [SOT223]  41.05,90.65 0 top
U$29  NSV1C201MZ4T1G  [SOT223]  97.16,85.87 0 top
U$30  NSV1C201MZ4T1G  [SOT223]  135.38,91.33 0 top
U$40  POGOPIN  [POGOPIN]  80.26,11.12 0 top
U$41  POGOPIN  [POGOPIN]  70.66,18.61 0 top
U$42  POGOPIN  [POGOPIN]  81.51,27.35 0 top
U$43  POGOPIN  [POGOPIN]  70.66,36.11 0 top
U$44  POGOPIN  [POGOPIN]  81.51,44.85 0 top
U$45  POGOPIN  [POGOPIN]  70.66,53.64 0 top
U$46  POGOPIN  [POGOPIN]  81.51,62.38 0 top
U$47  POGOPIN  [POGOPIN]  70.66,71.11 0 top
U$48  POGOPIN  [POGOPIN]  81.51,79.88 0 top
U$49  POGOPIN  [POGOPIN]  70.66,88.64 0 top
U$50  POGOPIN  [POGOPIN]  81.51,97.38 0 top
U$51  POGOPIN  [POGOPIN]  70.66,106.11 0 top
U$52  POGOPIN  [POGOPIN]  80.26,113.61 0 top

## Library data of the parts
C1 C2 C20 C21 C63 C64 = FSAE Electric; PARTNO: CL21B104KCC5PNC
C3 C4 C7 C9 C11 C13 C15 C17 C19 C23 C25 C27 C29 C33 C34 C37 C39 C41 C43 C45 C47 C49 C51 C53 C55 C57 C65 C66 C69 C71 C73 C75 C77 C79 C81 C83 C85 C87 C89 = FSAE Electric; PARTNO: CL10B103KC8NNNC
C30-C32 C58-C61 C90-C93 = FSAE Electric; PARTNO: UMK212F105ZG-T
D1-D36 = FSAE Electric; PARTNO: LH R974-LP-1
F1-F36 = FSAE Electric; PARTNO: C2Q 750
J1 J2 = FSAE Electric; PARTNO: DF13-2P-1.25DS(20)
Q1-Q39 = FSAE Electric; PARTNO: BSS308PE H6327
R2-R6 R11 R14 R17 R20 R23 R26 R29 R35 R74 R77 R78 R83 R86 R89 R92 R95 R98 R101 R107 R110 R149-R152 R158 R161 R164 R167 R170 R173 R176 R179 R185 = FSAE Electric; PARTNO: RC0603FR-07100RL
R7 R8 R12 R15 R18 R21 R24 R27 R30 R36 R80 R87 R90 R93 R96 R99 R102 R108 R111 R154 R159 R165 R168 R171 R174 R180 = FSAE Electric; PARTNO: RC0603JR-073K3L
R9 R10 R13 R16 R19 R22 R25 R28 R31 R34 R37 R40 R81 R82 R85 R88 R91 R94 R97 R100 R103 R106 R109 R112 R156 R157 R160 R163 R166 R169 R172 R175 R178 R181 R184 R187 = FSAE Electric; PARTNO: CRCW0201475RFKED
R32 R38 R75 R76 R104 R153 R182 = FSAE Electric; PARTNO: RC0805FR-07100RL
R33 R39 R79 R84 R105 R155 R162 R177 R183 R186 = FSAE Electric; PARTNO: RC0805FR-073K3L
R41 = FSAE Electric; PARTNO: RC0805JR-070RL
R42-R65 R114-R137 R189-R212 = FSAE Electric; PARTNO: RR02J16RTB
R66 R138 R213 = FSAE Electric; PARTNO: RC0603JR-071KL
R67 R139 R214 = FSAE Electric; PARTNO: MNR14ERAPJ103
R68 R140 R215 = FSAE Electric; PARTNO: RC0603JR-07100KL
R69 R141 R216 = FSAE Electric; PARTNO: RC0603JR-071K2L
R70 R142 R217 = FSAE Electric; PARTNO: RC0805FR-07787RL
R71-R73 R143-R147 R218-R221 = FSAE Electric; PARTNO: NXFT15XH103FA1B025
R113 R188 = FSAE Electric; PARTNO: CRCW06030000Z0EA
SJ1-SJ15 = SparkFun-Passives
TX1-TX3 = FSAE Electric; PARTNO: PE-68386NLT
U1-U3 = FSAE Electric; PARTNO: LTC6804IG-2#PBF
U$1-U$26 U$40-U$52 = FSAE Electric
U$27 = Pic
U$28-U$30 = FSAE Electric; PARTNO: NSV1C201MZ4T1G

## Nets
A0: SJ9.2 U2.45
A1: SJ8.2 U2.46
A2: SJ7.2 U2.47
A3: SJ6.2 U2.48
A4: SJ4.2 U1.45
A5: SJ3.2 U1.46
A6: SJ2.2 U1.47
A7: SJ1.2 U1.48
A8: SJ14.2 U3.45
A9: SJ13.2 U3.46
A10: SJ12.2 U3.47
A11: SJ11.2 U3.48
C0: C55.2 C57.1 R110.2 U2.26
C1: C53.2 C55.1 R107.2 U2.24
C2: C51.2 C53.1 R104.2 U2.22
C3: C49.2 C51.1 R101.2 U2.20
C4: C47.2 C49.1 R98.2 U2.18
C5: C43.2 C47.1 R92.2 U2.16
C6: C43.1 C45.2 R95.2 U2.14
C7: C41.2 C45.1 R89.2 U2.12
C8: C39.2 C41.1 R86.2 U2.10
C9: C37.2 C39.1 R83.2 U2.8
C10: C34.2 C37.1 R77.2 U2.6
C11: C33.2 C34.1 R78.2 U2.4
C12: C33.1 R76.2 U2.2
C13: C3.1 R4.2 U1.2
C14: C3.2 C4.1 R6.2 U1.4
C15: C7.2 C9.1 R11.2 U1.8
C16: C11.2 C15.1 R17.2 U1.12
C17: C13.1 C15.2 R23.2 U1.14
C18: C13.2 C17.1 R20.2 U1.16
C19: C19.2 C23.1 R29.2 U1.20
C20: C23.2 C25.1 R32.2 U1.22
C21: C25.2 C27.1 R35.2 U1.24
C22: C4.2 C7.1 R5.2 U1.6
C23: C27.2 C29.1 R38.2 U1.26
C24: C17.2 C19.1 R26.2 U1.18
C25: C9.2 C11.1 R14.2 U1.10
C26: C65.1 R151.2 U3.2
C27: C65.2 C66.1 R153.2 U3.4
C28: C69.2 C71.1 R158.2 U3.8
C29: C73.2 C77.1 R164.2 U3.12
C30: C75.1 C77.2 R170.2 U3.14
C31: C75.2 C79.1 R167.2 U3.16
C32: C81.2 C83.1 R176.2 U3.20
C33: C83.2 C85.1 R179.2 U3.22
C34: C85.2 C87.1 R182.2 U3.24
C35: C66.2 C69.1 R152.2 U3.6
C36: C87.2 C89.1 R185.2 U3.26
C37: C79.2 C81.1 R173.2 U3.18
C38: C71.2 C73.1 R161.2 U3.10
DRIVE: U2.38 U$29.P$1
DRIVE1: U1.38 U$30.P$1
DRIVE2: U3.38 U$28.P$1
GND: C63.2 C64.2 C89.2 C90.2 C91.2 C92.2 C93.2 R188.2 R217.1 R218.P$1 R219.P$1 R220.P$1 R221.P$1 SJ11.3 SJ12.3 SJ13.3 SJ14.3 U3.30 U3.31
GNDA: C20.2 C21.2 C57.2 C58.2 C59.2 C60.2 C61.2 R113.2 R142.1 R143.P$1 R144.P$1 R145.P$1 R146.P$1 SJ6.3 SJ7.3 SJ8.3 SJ9.3 U2.30 U2.31
GNDI: C1.2 C2.2 C29.2 C30.2 C31.2 C32.2 R41.2 R70.1 R71.P$1 R72.P$1 R73.P$1 R147.P$1 SJ1.3 SJ2.3 SJ3.3 SJ4.3 U1.30 U1.31
GPIO1: R139.1 R143.P$2 U2.27
GPIO2: R139.2 R144.P$2 U2.28
GPIO3: R139.3 R145.P$2 U2.29
GPIO4: R139.4 R146.P$2 U2.32
GPIO5: R138.2 U2.33
GPIO6: R67.2 R72.P$2 U1.28
GPIO7: R67.1 R71.P$2 U1.27
GPIO8: R67.4 R147.P$2 U1.32
GPIO9: R67.3 R73.P$2 U1.29
GPIO10: R66.2 U1.33
GPIO11: R214.2 R219.P$2 U3.28
GPIO12: R214.1 R218.P$2 U3.27
GPIO13: R214.4 R221.P$2 U3.32
GPIO14: R214.3 R220.P$2 U3.29
GPIO15: R213.2 U3.33
IBIAS: R141.2 U2.44
IBIAS1: R69.2 U1.44
IBIAS2: R216.2 U3.44
ICMP: R141.1 R142.2 U2.43
ICMP1: R69.1 R70.2 U1.43
ICMP2: R216.1 R217.2 U3.43
IMA: TX1.3 U2.41
IMA1: TX2.3 U1.41
IMA2: TX3.3 U3.41
IPA: TX1.1 U2.42
IPA1: TX2.1 U1.42
IPA2: TX3.1 U3.42
N$1: Q12.1 R7.1
N$2: D1.A Q12.3 R64.P$2 R65.P$2
N$3: D1.C R9.2
N$4: F26.2 Q11.2 R6.1 R9.1 R64.P$1 R65.P$1
N$5: Q11.1 R8.1
N$6: D2.A Q11.3 R62.P$2 R63.P$2
N$7: D2.C R10.2
N$8: F27.2 Q10.2 R5.1 R10.1 R62.P$1 R63.P$1
N$9: Q10.1 R12.1
N$10: D3.A Q10.3 R60.P$2 R61.P$2
N$11: D3.C R13.2
N$12: F28.2 Q9.2 R11.1 R13.1 R60.P$1 R61.P$1
N$13: Q9.1 R15.1
N$14: D4.A Q9.3 R58.P$2 R59.P$2
N$15: D4.C R16.2
N$16: F29.2 Q8.2 R14.1 R16.1 R58.P$1 R59.P$1
N$17: Q8.1 R18.1
N$18: D5.A Q8.3 R56.P$2 R57.P$2
N$19: D5.C R19.2
N$20: Q6.1 R21.1
N$21: D6.A Q6.3 R52.P$2 R53.P$2
N$22: D6.C R22.2
N$23: F30.2 Q7.2 R17.1 R19.1 R56.P$1 R57.P$1
N$24: Q7.1 R24.1
N$25: D7.A Q7.3 R54.P$2 R55.P$2
N$26: D7.C R25.2
N$27: F31.2 Q6.2 R23.1 R25.1 R54.P$1 R55.P$1
N$28: F32.2 Q5.2 R20.1 R22.1 R52.P$1 R53.P$1
N$29: Q5.1 R27.1
N$30: D9.A Q5.3 R50.P$2 R51.P$2
N$31: D9.C R28.2
N$32: F33.2 Q4.2 R26.1 R28.1 R50.P$1 R51.P$1
N$33: Q4.1 R30.1
N$34: D10.A Q4.3 R48.P$2 R49.P$2
N$35: D10.C R31.2
N$36: F34.2 Q2.2 R29.1 R31.1 R48.P$1 R49.P$1
N$37: Q2.1 R33.1
N$38: D11.A Q2.3 R46.P$2 R47.P$2
N$39: D11.C R34.2
N$40: F35.2 Q1.2 R32.1 R34.1 R46.P$1 R47.P$1
N$41: Q1.1 R36.1
N$42: D12.A Q1.3 R44.P$2 R45.P$2
N$43: D12.C R37.2
N$44: Q3.1 R39.1
N$45: D13.C R40.2
N$46: F25.2 Q12.2 R2.1 R3.1 R4.1
N$47: D13.A Q3.3 R42.P$2 R43.P$2
N$48: R38.1 R40.1 R41.1 R42.P$1 R43.P$1 U$1.1
N$49: F36.2 Q3.2 R35.1 R37.1 R44.P$1 R45.P$1
N$50: C2.1 R2.2 U$30.P$2
N$52: Q13.3 R67.5 R67.6 R67.7 R67.8
N$53: Q13.1 R66.1 R68.1
N$55: Q25.1 R154.1
N$56: D25.A Q25.3 R211.P$2 R212.P$2
N$57: D25.C R156.2
N$58: F2.2 Q24.2 R153.1 R156.1 R211.P$1 R212.P$1
N$59: Q24.1 R155.1
N$60: D26.A Q24.3 R209.P$2 R210.P$2
N$61: D26.C R157.2
N$62: F3.2 Q23.2 R152.1 R157.1 R209.P$1 R210.P$1
N$63: Q23.1 R159.1
N$64: D27.A Q23.3 R207.P$2 R208.P$2
N$65: D27.C R160.2
N$66: F4.2 Q22.2 R158.1 R160.1 R207.P$1 R208.P$1
N$67: Q22.1 R162.1
N$68: D28.A Q22.3 R205.P$2 R206.P$2
N$69: D28.C R163.2
N$70: F5.2 Q21.2 R161.1 R163.1 R205.P$1 R206.P$1
N$71: Q21.1 R165.1
N$72: D29.A Q21.3 R203.P$2 R204.P$2
N$73: D29.C R166.2
N$74: Q19.1 R168.1
N$75: D30.A Q19.3 R199.P$2 R200.P$2
N$76: D30.C R169.2
N$77: F6.2 Q20.2 R164.1 R166.1 R203.P$1 R204.P$1
N$78: Q20.1 R171.1
N$79: D31.A Q20.3 R201.P$2 R202.P$2
N$80: D31.C R172.2
N$81: F7.2 Q19.2 R170.1 R172.1 R201.P$1 R202.P$1
N$82: F8.2 Q18.2 R167.1 R169.1 R199.P$1 R200.P$1
N$83: Q18.1 R174.1
N$84: D32.A Q18.3 R197.P$2 R198.P$2
N$85: D32.C R175.2
N$86: F9.2 Q17.2 R173.1 R175.1 R197.P$1 R198.P$1
N$87: Q17.1 R177.1
N$88: D33.A Q17.3 R195.P$2 R196.P$2
N$89: D33.C R178.2
N$90: F10.2 Q15.2 R176.1 R178.1 R195.P$1 R196.P$1
N$91: Q15.1 R180.1
N$92: D34.A Q15.3 R193.P$2 R194.P$2
N$93: D34.C R181.2
N$94: F11.2 Q14.2 R179.1 R181.1 R193.P$1 R194.P$1
N$95: Q14.1 R183.1
N$96: D35.A Q14.3 R191.P$2 R192.P$2
N$97: D35.C R184.2
N$98: Q16.1 R186.1
N$99: D36.C R187.2
N$100: F1.2 Q25.2 R149.1 R150.1 R151.1
N$101: D36.A Q16.3 R189.P$2 R190.P$2
N$102: Q38.1 R79.1
N$103: D8.A Q38.3 R136.P$2 R137.P$2
N$104: D8.C R81.2
N$105: R185.1 R187.1 R188.1 R189.P$1 R190.P$1 U$14.1
N$106: F12.2 Q16.2 R182.1 R184.1 R191.P$1 R192.P$1
N$107: C64.1 R149.2 U$28.P$2
N$108: F14.2 Q37.2 R78.1 R81.1 R136.P$1 R137.P$1
N$110: Q37.1 R80.1
N$111: D14.A Q37.3 R134.P$2 R135.P$2
N$112: D14.C R82.2
N$113: F15.2 Q36.2 R77.1 R82.1 R134.P$1 R135.P$1
N$114: Q26.3 R214.5 R214.6 R214.7 R214.8
N$115: Q36.1 R84.1
N$116: D15.A Q36.3 R132.P$2 R133.P$2
N$117: D15.C R85.2
N$118: F16.2 Q35.2 R83.1 R85.1 R132.P$1 R133.P$1
N$119: Q26.1 R213.1 R215.1
N$121: Q35.1 R87.1
N$122: D16.A Q35.3 R130.P$2 R131.P$2
N$123: D16.C R88.2
N$124: F17.2 Q34.2 R86.1 R88.1 R130.P$1 R131.P$1
N$125: J1.2 J2.1 TX1.6 TX2.6 TX3.6
N$126: Q34.1 R90.1
N$127: D17.A Q34.3 R128.P$2 R129.P$2
N$128: D17.C R91.2
N$129: J1.1 J2.2 TX1.4 TX2.4 TX3.4
N$130: Q32.1 R93.1
N$131: D18.A Q32.3 R124.P$2 R125.P$2
N$132: D18.C R94.2
N$133: C90.1 U3.35
N$134: F18.2 Q33.2 R89.1 R91.1 R128.P$1 R129.P$1
N$135: C30.1 U1.35
N$136: Q33.1 R96.1
N$137: D19.A Q33.3 R126.P$2 R127.P$2
N$138: D19.C R97.2
N$139: F19.2 Q32.2 R95.1 R97.1 R126.P$1 R127.P$1
N$142: F20.2 Q31.2 R92.1 R94.1 R124.P$1 R125.P$1
N$144: Q31.1 R99.1
N$145: D20.A Q31.3 R122.P$2 R123.P$2
N$146: D20.C R100.2
N$147: F21.2 Q30.2 R98.1 R100.1 R122.P$1 R123.P$1
N$149: Q30.1 R102.1
N$150: D21.A Q30.3 R120.P$2 R121.P$2
N$151: D21.C R103.2
N$152: F22.2 Q28.2 R101.1 R103.1 R120.P$1 R121.P$1
N$154: Q28.1 R105.1
N$155: D22.A Q28.3 R118.P$2 R119.P$2
N$156: D22.C R106.2
N$159: F23.2 Q27.2 R104.1 R106.1 R118.P$1 R119.P$1
N$161: Q27.1 R108.1
N$162: D23.A Q27.3 R116.P$2 R117.P$2
N$163: D23.C R109.2
N$165: Q29.1 R111.1
N$166: D24.C R112.2
N$170: F13.2 Q38.2 R74.1 R75.1 R76.1
N$175: D24.A Q29.3 R114.P$2 R115.P$2
N$176: R110.1 R112.1 R113.1 R114.P$1 R115.P$1 U$40.1
N$177: F24.2 Q29.2 R107.1 R109.1 R116.P$1 R117.P$1
N$178: C21.1 R74.2 U$29.P$2
N$192: Q39.3 R139.5 R139.6 R139.7 R139.8
N$193: Q39.1 R138.1 R140.1
N$262: F12.1 U$15.1
N$264: F11.1 U$16.1
N$286: F10.1 U$17.1
N$287: F9.1 U$18.1
N$288: F8.1 U$19.1
N$289: F7.1 U$20.1
N$290: F6.1 U$21.1
N$291: F5.1 U$22.1
N$292: F4.1 U$23.1
N$293: F3.1 U$24.1
N$294: F2.1 U$25.1
N$295: F1.1 U$26.1
N$296: F24.1 U$41.1
N$297: F23.1 U$42.1
N$298: F22.1 U$43.1
N$299: F21.1 U$44.1
N$300: F20.1 U$45.1
N$301: F19.1 U$46.1
N$302: F18.1 U$47.1
N$303: F17.1 U$48.1
N$304: F16.1 U$49.1
N$305: F15.1 U$50.1
N$306: F14.1 U$51.1
N$307: F13.1 U$52.1
N$308: F36.1 U$2.1
N$309: F35.1 U$3.1
N$310: F34.1 U$4.1
N$311: F33.1 U$5.1
N$312: F32.1 U$6.1
N$313: F31.1 U$7.1
N$314: F30.1 U$8.1
N$315: F29.1 U$9.1
N$316: F28.1 U$10.1
N$317: F27.1 U$11.1
N$318: F26.1 U$12.1
N$319: F25.1 U$13.1
S1: R111.2 U2.25
S2: R108.2 U2.23
S3: R105.2 U2.21
S4: R102.2 U2.19
S5: R99.2 U2.17
S6: R93.2 U2.15
S7: R96.2 U2.13
S8: R90.2 U2.11
S9: R87.2 U2.9
S10: R84.2 U2.7
S11: R80.2 U2.5
S12: R79.2 U2.3
S13: R7.2 U1.3
S14: R8.2 U1.5
S15: R12.2 U1.7
S16: R15.2 U1.9
S17: R18.2 U1.11
S18: R21.2 U1.15
S19: R24.2 U1.13
S20: R27.2 U1.17
S21: R30.2 U1.19
S22: R33.2 U1.21
S23: R36.2 U1.23
S24: R39.2 U1.25
S25: R154.2 U3.3
S26: R155.2 U3.5
S27: R159.2 U3.7
S28: R162.2 U3.9
S29: R165.2 U3.11
S30: R168.2 U3.15
S31: R171.2 U3.13
S32: R174.2 U3.17
S33: R177.2 U3.19
S34: R180.2 U3.21
S35: R183.2 U3.23
S36: R186.2 U3.25
SWTEN: SJ10.1 U2.36
SWTEN1: SJ5.1 U1.36
SWTEN2: SJ15.1 U3.36
V+: C20.1 R75.2 U2.1
V+1: C1.1 R3.2 U1.1
V+2: C63.1 R150.2 U3.1
VREF1: C58.1 U2.35
VREF2: C59.1 Q39.2 R140.2 U2.34
VREF4: C31.1 Q13.2 R68.2 U1.34
VREF6: C91.1 Q26.2 R215.2 U3.34
VREG: C60.1 C61.1 SJ6.1 SJ7.1 SJ8.1 SJ9.1 SJ10.2 U2.37 U2.40 U$29.P$3
VREG1: C32.1 SJ1.1 SJ2.1 SJ3.1 SJ4.1 SJ5.2 U1.37 U1.40 U$30.P$3
VREG2: C92.1 C93.1 SJ11.1 SJ12.1 SJ13.1 SJ14.1 SJ15.2 U3.37 U3.40 U$28.P$3

## Tracks (layer width: path | path; a pad name or v marks a point on that pad's centre or on a via)
A0  (via drill 0.5)
  Top 0.178: SJ9.2 100.79,67.66 101.09,67.35 104.65,67.35 105,67.71 v105,68.42 | v96.65,71.09 94.88,71.09 U2.45
  Bottom 0.178: v105,68.42 105,67.53 104.65,67.18 98.96,67.18 98.43,67.71 98.43,70.55 98.25,70.73 97,70.73 v96.65,71.09
A1  (via drill 0.5)
  Top 0.178: SJ8.2 100.79,72.2 101.09,72.51 103.58,72.51 v103.76,72.33 | v98.43,71.62 97.36,71.62 97,71.98 96.29,71.98 95.94,71.62 94.91,71.62 U2.46
  Bottom 0.178: v103.76,72.33 103.76,72.51 103.4,72.69 99.14,72.69 98.78,72.33 98.78,71.98 v98.43,71.62
A2  (via drill 0.5)
  Top 0.178: U2.47 95.85,72.07 96.29,72.51 97.71,72.51 98.25,73.04 v98.25,74.64 | v104.12,74.64 104.12,74.82 103.94,75 101.09,75 100.74,74.64 100.74,74.03 SJ7.2
  Bottom 0.178: v98.25,74.64 v104.12,74.64
A3  (via drill 0.5)
  Top 0.178: U2.48 95.64,72.57 95.94,72.86 95.94,75.53 96.83,76.42 v97.89,76.42 | v104.29,76.42 104.12,76.42 103.05,75.35 101.09,75.35 100.91,75.53 100.91,76.4 SJ6.2
  Bottom 0.178: v97.89,76.42 97.89,76.24 98.78,75.35 103.76,75.35 104.29,75.89 v104.29,76.42
A4  (via drill 0.5)
  Top 0.178: U1.45 147.87,70.18 148.39,69.67 148.39,69.13 148.74,68.78 v149.63,68.78 | v146.96,36.06 146.96,36.95 146.61,37.3 142.16,37.3 141.63,36.77 141.63,36.06 SJ4.2
  Bottom 0.178: v149.63,68.78 147.85,68.78 147.32,68.24 147.32,59.53 148.74,58.11 148.74,46.2 149.1,45.84 149.1,37.84 v146.96,36.06
A5  (via drill 0.5)
  Top 0.178: U1.46 147.9,70.68 148.74,69.84 v149.63,69.84 | v146.96,38.73 146.96,39.62 146.79,39.79 141.99,39.79 141.63,39.44 141.63,38.6 SJ3.2
  Bottom 0.178: v149.63,69.84 147.32,69.84 146.96,69.49 146.96,59.35 148.39,57.93 148.39,46.02 148.56,45.84 148.56,39.97 v146.96,38.73
A6  (via drill 0.5)
  Top 0.178: U1.47 149.36,71.18 v149.63,70.91 | v146.96,41.93 146.96,42.11 146.43,42.46 141.99,42.46 141.63,42.11 141.63,41.14 SJ2.2
  Bottom 0.178: v149.63,70.91 146.79,70.91 146.61,70.73 146.61,59.17 148.03,57.75 148.03,46.02 148.21,45.84 148.21,43.35 v146.96,41.93
A7  (via drill 0.5)
  Top 0.178: U1.48 149.34,71.68 v149.63,71.98 | v146.96,45.66 142.34,45.66 141.81,45.13 141.81,43.81 SJ1.2
  Bottom 0.178: v149.63,71.98 146.61,71.98 146.25,71.62 146.25,58.46 146.61,58.11 147.14,58.11 147.68,57.57 147.68,46.37 v146.96,45.66
A8  (via drill 0.5)
  Top 0.178: SJ14.2 45.06,77.82 45.26,78.02 v52.73,78.02 | U3.45 42.93,75.52 v42.95,75.53
  Bottom 0.178: v42.95,75.53 52.02,75.53 52.73,76.24 v52.73,78.02
A9  (via drill 0.5)
  Top 0.178: SJ13.2 45.06,80.48 45.26,80.69 v52.73,80.69 | U3.46 42.01,76.02 42.24,76.24 42.24,79.09 v42.6,79.44
  Bottom 0.178: v42.6,79.44 51.49,79.44 v52.73,80.69
A10  (via drill 0.5)
  Top 0.178: SJ12.2 45.06,83.33 45.26,83.53 v52.73,83.53 | U3.47 41.45,76.52 41.71,76.78 41.71,83.18 v41.89,83.36
  Bottom 0.178: v41.89,83.36 52.55,83.36 v52.73,83.53
A11  (via drill 0.5)
  Top 0.178: SJ11.2 45.06,86.17 45.26,86.38 v52.73,86.38 | U3.48 40.51,85.53 v41.17,86.2
  Bottom 0.178: v41.17,86.2 52.55,86.2 v52.73,86.38
C0  (via drill 0.5)
  Top 0.178: U2.26 95.75,61.57 arc-45 95.93,61.5 95.94,61.49 95.94,60.35 arc-45 95.86,60.17 95.58,59.89 87.15,59.89 arc45 86.97,59.81 86.69,59.53 86.69,16.96 arc-45 86.62,16.78 85.98,16.15 77.55,16.15 arc45 77.37,16.07 76.73,15.44 | 76.73,15.44 76.73,13.27 arc45 76.81,13.09 R110.2 | 76.73,15.44 76.73,15.86 arc45 76.66,16.04 76.56,16.15 v76.56,17.04
  Bottom 0.178: C57.1 C55.2 76.03,41.46 arc-45 76.21,41.39 76.73,40.86 76.73,39.54 arc45 76.81,39.36 77.09,39.08 82.14,39.08 arc-45 82.32,39.01 83.13,38.19 83.13,28.34 arc45 83.21,28.16 83.49,27.88 83.49,18.92 arc-45 83.42,18.74 82.78,18.1 77.73,18.1 arc45 77.55,18.03 v76.56,17.04
C1  (via drill 0.5)
  Top 0.178: v79.05,34.74 79.05,32.62 | U2.24 86.38,61.07 arc45 86.2,61 85.98,60.77 85.98,33.32 arc-45 85.91,33.14 85.45,32.68 79.21,32.68 arc45 79.03,32.61 R107.2
  Top 0.406: 79.05,32.62 R107.2
  Bottom 0.178: C53.2 C55.1 | 74.46,43.16 74.17,42.87 74.17,35.96 74.98,35.15 78.64,35.15 v79.05,34.74
  Bottom 0.406: C55.1 74.46,43.16
C2  (via drill 0.5)
  Top 0.178: v79.05,44.9 79.01,44.86 R104.2 79.11,39.62 84.38,39.62 85.27,40.51 85.27,61.66 85.67,62.07 U2.22
  Bottom 0.178: C51.2 C53.1 | v79.05,44.9 79.05,46.93 78.64,47.34 75.32,47.34
  Bottom 0.406: 75.32,47.34 C53.1
C3  (via drill 0.5)
  Top 0.178: R101.2 78.95,49.69 v79.05,49.78 79.07,49.75 84.02,49.75 84.56,50.28 84.56,62.73 84.9,63.07 U2.20
  Bottom 0.178: C49.2 C51.1 | v79.05,49.78 76.61,49.78 76.2,50.18 76.2,51.4 75.79,51.81 75.2,51.81
  Bottom 0.406: 75.2,51.81 C51.1
C4  (via drill 0.5)
  Top 0.178: R98.2 78.95,55.78 v79.05,55.87 79.15,55.97 83.67,55.97 83.84,56.15 83.84,63.8 84.12,64.07 U2.18
  Bottom 0.178: C47.2 C49.1 | v79.05,55.87 77.01,55.87 76.61,56.28 75.27,56.28
  Bottom 0.406: 75.27,56.28 C49.1
C5  (via drill 0.5)
  Top 0.178: 79.05,59.92 v79.05,61.16 80.09,61.16 80.65,60.6 82.6,60.6 83.13,61.13 83.13,64.69 83.49,65.04 87.99,65.04 U2.16
  Top 0.406: 79.05,59.92 R92.2
  Bottom 0.178: C43.2 C47.1 78.57,60.69 v79.05,61.16
C6  (via drill 0.5)
  Top 0.178: v80.26,66.84 82.58,66.84 83.31,66.11 87.98,66.11 U2.14
  Top 0.406: v80.26,66.84 78.98,66.84 R95.2
  Bottom 0.178: C43.1 C45.2 79.49,67.62 v80.26,66.84
C7  (via drill 0.5)
  Top 0.178: v79.05,73.35 78.95,73.26 R89.2 82.14,71.9 82.96,71.09 82.96,67.53 83.49,67 87.95,67 U2.12
  Bottom 0.178: C41.2 C45.1 | v79.05,73.35 79.05,72.13 78.64,71.72 75.4,71.72
  Bottom 0.406: 75.4,71.72 C41.2
C8  (via drill 0.5)
  Top 0.178: 79.05,78.34 v79.05,76.6 83.31,76.6 83.67,76.24 83.67,68.78 84.38,68.06 U2.10
  Top 0.406: 79.05,78.34 R86.2
  Bottom 0.178: C41.1 C39.2 78.88,76.77 v79.05,76.6
C9  (via drill 0.5)
  Top 0.178: R83.2 80.54,84.6 v80.67,84.73 80.72,84.78 83.84,84.78 84.38,84.24 84.38,69.49 84.8,69.07 U2.8
  Bottom 0.178: C37.2 C39.1 | v80.67,84.73 80.67,83.91 80.26,83.51 77.01,83.51 76.61,83.1 76.61,81.48 76.2,81.07 75.2,81.07
  Bottom 0.406: 75.2,81.07 C37.2
C10  (via drill 0.5)
  Top 0.178: R77.2 80.59,89.68 v80.67,89.6 80.7,89.58 84.56,89.58 85.09,89.05 85.09,70.38 85.4,70.07 U2.6
  Bottom 0.178: C34.2 C37.1 | v80.67,89.6 80.67,86.35 80.26,85.95 75.48,85.95
  Bottom 0.406: 75.48,85.95 C34.2
C11  (via drill 0.5)
  Top 0.178: R78.2 78.21,95.27 v78.23,95.29 78.26,95.27 85.27,95.27 85.8,94.73 85.8,71.44 86.17,71.07 U2.4
  Bottom 0.178: C33.2 C34.1 | v78.23,95.29 78.23,90.82 77.83,90.42 75.37,90.42
  Bottom 0.406: 75.37,90.42 C33.2
C12  (via drill 0.5)
  Top 0.178: 76.54,103.45 v77.98,103.45 85.98,103.45 86.51,102.91 86.51,72.33 86.77,72.07 U2.2
  Top 0.406: 76.54,103.45 R76.2
  Bottom 0.178: C33.1 75.18,95.67 75.84,96.34 77.8,96.34 78.16,96.69 78.16,103.27
  Bottom 0.406: 78.16,103.27 v77.98,103.45
C13  (via drill 0.5)
  Top 0.178: R4.2 129.51,103.65 | U1.2 135.85,71.18 135.41,71.62 135.41,88.87 135.05,89.22 134.52,89.22 134.16,89.58 134.16,103.45 133.99,103.62 v129.54,103.62
  Top 0.406: 129.51,103.65 v129.54,103.62
  Bottom 0.178: v129.54,103.62 129.54,102.74 129.01,102.2 122.96,102.2 122.43,101.67 C3.1
C14  (via drill 0.5)
  Top 0.178: R6.2 129.21,94.58 v129.36,94.73 133.1,94.73 133.45,94.38 133.45,89.22 134.7,87.98 134.7,70.73 135.25,70.18 U1.4
  Bottom 0.178: C4.1 C3.2 | v129.36,94.73 129.36,91.18 129.01,90.82 126.52,90.82 126.16,90.47 122.44,90.47
  Bottom 0.406: 122.44,90.47 C3.2
C15  (via drill 0.5)
  Top 0.178: R11.2 v129.36,84.6 132.74,84.6 133.27,84.07 133.27,69.31 134.4,68.18 U1.8
  Bottom 0.178: C9.1 C7.2 | v129.36,84.6 129.36,82.82 129.01,82.47 122.54,82.47
  Bottom 0.406: 122.54,82.47 C7.2
C16  (via drill 0.5)
  Top 0.178: 127.9,68.78 v129.36,68.78 131.14,68.78 131.67,68.24 131.67,67.35 132.85,66.18 U1.12
  Top 0.406: 127.9,68.78 R17.2
  Bottom 0.178: C11.2 C15.1 124.86,71.86 125.27,71.44 125.27,69.31 125.63,68.95 129.18,68.95 v129.36,68.78
C17  (via drill 0.5)
  Top 0.178: R23.2 129.13,59.84 v129.18,59.89 129.18,64.69 129.68,65.18 U1.14
  Bottom 0.178: C13.1 C15.2 | v129.18,59.89 129.18,63.98 128.83,64.33 124.03,64.33 123.67,64.69 123.67,67.53 123.5,67.71 122.52,67.71
  Bottom 0.406: 122.52,67.71 C13.1
C18  (via drill 0.5)
  Top 0.178: R20.2 129.29,55.01 v129.36,55.09 130.07,55.09 130.43,55.44 130.43,63.8 130.81,64.18 U1.16
  Bottom 0.178: C17.1 C13.2 | v129.36,55.09 129.36,58.46 129.01,58.82 128.47,58.82 127.94,59.35 125.27,59.35 124.92,59.71 124.92,63.09 124.56,63.44 122.47,63.44
  Bottom 0.406: 122.47,63.44 C17.1
C19  (via drill 0.5)
  Top 0.178: R29.2 129.31,42.05 v129.36,42.11 131.32,42.11 131.85,42.64 131.85,61.84 132.19,62.18 U1.20
  Bottom 0.178: C23.1 C19.2 | v129.36,42.11 126.16,42.11 125.09,43.17 125.09,54.02 124.74,54.37 123.5,54.37 122.96,54.91 122.49,54.91
  Bottom 0.406: 122.49,54.91 C23.1
C20  (via drill 0.5)
  Top 0.178: 127.86,38.63 127.05,39.44 127.05,43 126.87,43.17 125.63,43.17 124.92,43.88 124.92,45.84 v124.03,46.73 | U1.22 132.97,61.18 132.56,60.77 132.56,39.26 132.03,38.73 128,38.73 R32.2
  Top 0.406: R32.2 127.86,38.63
  Bottom 0.178: C25.1 C23.2 | v124.03,46.73 124.03,50.28 123.5,50.82 122.47,50.82
  Bottom 0.406: 122.47,50.82 C25.1
C21  (via drill 0.5)
  Top 0.178: v120.65,47.08 120.65,47.62 120.83,47.8 121.9,47.8 122.07,47.97 122.07,48.68 122.43,49.04 v130.25,49.04 | 127.95,34.46 v129.36,34.46 129.54,34.28 132.74,34.28 133.27,34.82 133.27,59.89 133.57,60.18 U1.24
  Top 0.406: 127.95,34.46 R35.2
  Bottom 0.178: C25.2 C27.1 120.99,46.21 120.65,46.55 v120.65,47.08 | v130.25,49.04 130.25,35.35 v129.36,34.46
C22  (via drill 0.5)
  Top 0.178: R5.2 129.46,89.68 v129.54,89.76 132.38,89.76 132.74,89.4 132.74,88.87 133.99,87.62 133.99,69.84 134.65,69.18 U1.6
  Bottom 0.178: C7.1 C4.2 | v129.54,89.76 129.54,87.09 129.01,86.56 122.57,86.56
  Bottom 0.406: 122.57,86.56 C4.2
C23  (via drill 0.5)
  Top 0.178: R38.2 125.22,24.38 123.67,25.93 123.67,29.13 123.5,29.3 | 123.5,29.3 v123.14,29.66 | U1.26 144.57,60.68 144.65,60.6 144.65,59.89 144.48,59.71 139.14,59.71 138.79,59.35 134.34,59.35 133.99,59 133.99,30.37 133.27,29.66 123.85,29.66 123.5,29.3
  Bottom 0.178: C29.1 C27.2 | v123.14,29.66 123.14,38.55 123.85,39.26 123.85,41.04 123.5,41.39 122.44,41.39
  Bottom 0.406: 122.44,41.39 C29.1
C24  (via drill 0.5)
  Top 0.178: v120.83,63.62 120.83,61.84 121.72,60.95 121.72,58.46 122.07,58.11 123.14,58.11 123.5,57.75 123.5,56.69 124.03,56.15 v124.38,56.15 | U1.18 131.41,63.18 131.14,62.91 131.14,51.35 130.78,51 v129.36,51 129.36,50.28 129.18,50.11 127.93,50.11
  Top 0.406: 127.93,50.11 R26.2
  Bottom 0.178: C19.1 C17.2 121.78,61.78 121.36,62.2 121.36,63.09 v120.83,63.62 | v129.36,51 127.41,51 126.87,51.35 126.87,55.8 126.52,56.15 v124.38,56.15
C25  (via drill 0.5)
  Top 0.178: R14.2 129.08,76.34 | U1.10 133.45,67.18 132.56,68.06 132.56,75.71 132.03,76.24 v129.18,76.24
  Top 0.406: 129.08,76.34 v129.18,76.24
  Bottom 0.178: C9.2 C11.1 123.46,76.95 128.83,76.95 129.18,76.6
  Bottom 0.406: v129.18,76.24 129.18,76.6
C26  (via drill 0.5)
  Top 0.178: 23.84,100.98 24.64,100.98 24.89,100.73 v24.89,99.71 30.86,99.71 31.3,99.27 31.3,76.87 31.66,76.52 U3.2
  Top 0.406: 23.84,100.98 R151.2
  Bottom 0.178: C65.1 24.47,98.78 24.89,99.2 v24.89,99.71
C27  (via drill 0.5)
  Top 0.178: 23.89,94.63 24.64,94.63 24.89,94.38 v24.89,93.62 25.3,93.67 30.06,93.67 30.42,93.31 30.42,75.89 30.7,75.52 U3.4
  Top 0.406: 23.89,94.63 R153.2
  Bottom 0.178: C65.2 C66.1 24.45,93.7 v24.89,93.62
C28  (via drill 0.5)
  Top 0.178: 23.84,80.66 24.64,80.66 24.89,80.92 v24.89,81.93 28.28,81.93 28.64,81.58 28.64,73.75 28.88,73.52 U3.8
  Top 0.406: 23.84,80.66 R158.2
  Bottom 0.178: C71.1 C69.2 24.5,82.58 24.89,82.19 v24.89,81.93
C29  (via drill 0.5)
  Top 0.178: v25.15,66.95 25.15,67.71 24.89,67.96 23.84,67.96 | U3.12 27.82,71.52 27.57,71.27 27.57,67.18 27.3,66.91 25.18,66.91 v25.15,66.95 | 25.2,67 v25.15,66.95
  Top 0.406: 23.84,67.96 R164.2
  Bottom 0.178: C77.1 C73.2 20.54,69.78 20.83,69.49 20.83,67.2 21.08,66.95 v25.15,66.95
C30  (via drill 0.5)
  Top 0.178: R170.2 25.02,63.01 25.15,63.14 v25.15,64.41 25.25,64.51 28.11,64.51 28.46,64.86 28.46,70.2 28.78,70.52 U3.14
  Bottom 0.178: C77.2 C75.1 | v25.15,64.41 24.64,64.41 24.38,64.15 24.38,61.87 24.13,61.61 20.83,61.61 20.57,61.87 20.57,63.65 20.32,63.9 19.85,63.9
  Bottom 0.406: 19.85,63.9 C77.2
C31  (via drill 0.5)
  Top 0.178: 23.84,58.31 24.64,58.31 24.89,58.06 v24.89,57.3 24.99,57.4 28.99,57.4 29.35,57.75 29.35,69.13 29.73,69.52 U3.16
  Top 0.406: 23.84,58.31 R167.2
  Bottom 0.178: C79.1 C75.2 20.41,58.98 20.57,58.82 20.57,57.55 20.83,57.3 v24.89,57.3
C32  (via drill 0.5)
  Top 0.178: R176.2 24.64,43.33 24.89,43.07 v24.89,42.31 24.92,42.28 30.68,42.28 31.04,42.64 31.04,67.35 31.2,67.52 U3.20
  Bottom 0.178: C83.1 C81.2 19.69,43.2 20.83,42.05 24.64,42.05 v24.89,42.31
C33  (via drill 0.5)
  Top 0.178: R179.2 25.02,38.63 25.15,38.75 v25.15,39.77 25.17,39.79 31.39,39.79 31.75,40.15 31.75,66.29 31.98,66.52 U3.22
  Bottom 0.178: C83.2 C85.1 | v25.15,39.77 23.11,39.77 22.86,39.52 22.86,36.72 22.61,36.47 20.83,36.47 20.57,36.72 19.72,36.72
  Bottom 0.406: 19.72,36.72 C83.2
C34  (via drill 0.5)
  Top 0.178: 23.89,32.15 24.64,32.15 24.89,31.89 v24.89,31.39 24.94,31.44 32.11,31.44 32.46,31.79 32.46,65.22 32.76,65.52 U3.24
  Top 0.406: 23.89,32.15 R182.2
  Bottom 0.178: C87.1 C85.2 19.69,29.23 20.32,28.59 22.61,28.59 22.86,28.85 22.86,30.88 23.11,31.13 24.64,31.13 v24.89,31.39
C35  (via drill 0.5)
  Top 0.178: 23.84,85.74 24.89,85.74 25.15,85.49 v25.15,84.47 25.2,84.42 29.17,84.42 29.53,84.07 29.53,74.82 29.83,74.52 U3.6
  Top 0.406: 23.84,85.74 R152.2
  Bottom 0.178: C66.2 C69.1 22.42,84.28 22.61,84.47 22.61,86.76 22.86,87.01 24.13,87.01 24.38,86.76 24.38,84.73 24.64,84.47 v25.15,84.47
C36  (via drill 0.5)
  Top 0.178: v33.35,17.21 33.17,17.39 33.17,64.33 33.35,64.51 38.33,64.51 38.86,65.04 41.53,65.04 41.71,65.22 41.71,65.66 41.35,65.93 40.59,65.93 U3.26
  Bottom 0.178: C87.2 C89.1
  Bottom 0.406: R185.2 34.8,17.04 | 34.8,17.04 34.8,20.97 34.29,21.48 24.64,21.48 24.38,21.73 21.34,21.73 21.08,21.99 21.08,22.75 20.83,23.01 19.9,23.01 C89.1 | v33.35,17.21 34.62,17.21 34.8,17.04
C37  (via drill 0.5)
  Top 0.178: R173.2 24.64,49.67 24.89,49.93 v24.89,50.95 24.94,51 29.88,51 30.24,51.35 30.24,68.24 30.51,68.52 U3.18
  Bottom 0.178: C81.1 C79.2 24.73,51.37 24.89,51.2 v24.89,50.95
C38  (via drill 0.5)
  Top 0.178: R161.2 24.89,76.34 25.15,76.09 v25.15,75.33 27.3,75.33 27.83,74.81 27.83,72.7 28.01,72.52 U3.10
  Bottom 0.178: C73.1 C71.2 24.98,76.77 25.15,76.6 v25.15,75.33
DRIVE
  Top 0.178: U2.38 93.13,67.57 92.56,67 91.14,67 90.25,67.89 90.25,76.07 90.78,76.6 93.8,76.6 94.87,77.67 94.87,79.98 94.69,80.16 94.69,83.36 95.4,84.07 96.83,84.07 97,84.24 97,85.72 U$29.P$1
DRIVE1
  Top 0.178: U1.38 140.35,66.68 140.03,67 140.03,73.22 139.85,73.4 139.85,78.73 139.5,79.09 138.07,79.09 137.9,79.27 137.9,81.04 137.54,81.4 136.47,81.4 135.94,81.93 135.94,89.4 135.41,89.93 135.41,91.31 U$30.P$1
DRIVE2  (via drill 0.5)
  Top 0.178: U3.38 41.92,72.02 v42.06,72.15 | v41,88.69 41,90.59 U$28.P$1
  Bottom 0.178: v42.06,72.15 42.06,78.56 41.53,79.09 41.53,82.11 41.17,82.47 40.46,82.47 40.11,82.82 40.11,87.8 v41,88.69
GND  (via drill 0.5)
  Top 0.178: v38.68,68.24 39.04,68.24 39.4,68.6 40.42,68.6 U3.31
  other vias: 40.28,61.49
  pour Top: -1.27,125.88 54.86,125.88 54.86,-1.12 -1.27,-1.12
  pour Bottom: -1.27,125.88 54.86,125.88 54.86,-1.12 -1.27,-1.12
GNDA  (via drill 0.5)  (1 unrouted)
  Top 0.178: U2.30 U2.31 93.01,64.07 v92.91,65.93